# Altium PCB 400926.PcbDoc (part 5 of 7)
Units mm, origin at the board's own origin, x right, y up, seen from the top; angles counter-clockwise.
Board outline 148.5 x 63.5 mm, 4 copper layers (Top Layer, Mid-Layer 1, Mid-Layer 2, Bottom Layer), stack 1.514 mm thick; 311 components, 281 nets, 1495 pads, 2232 vias.
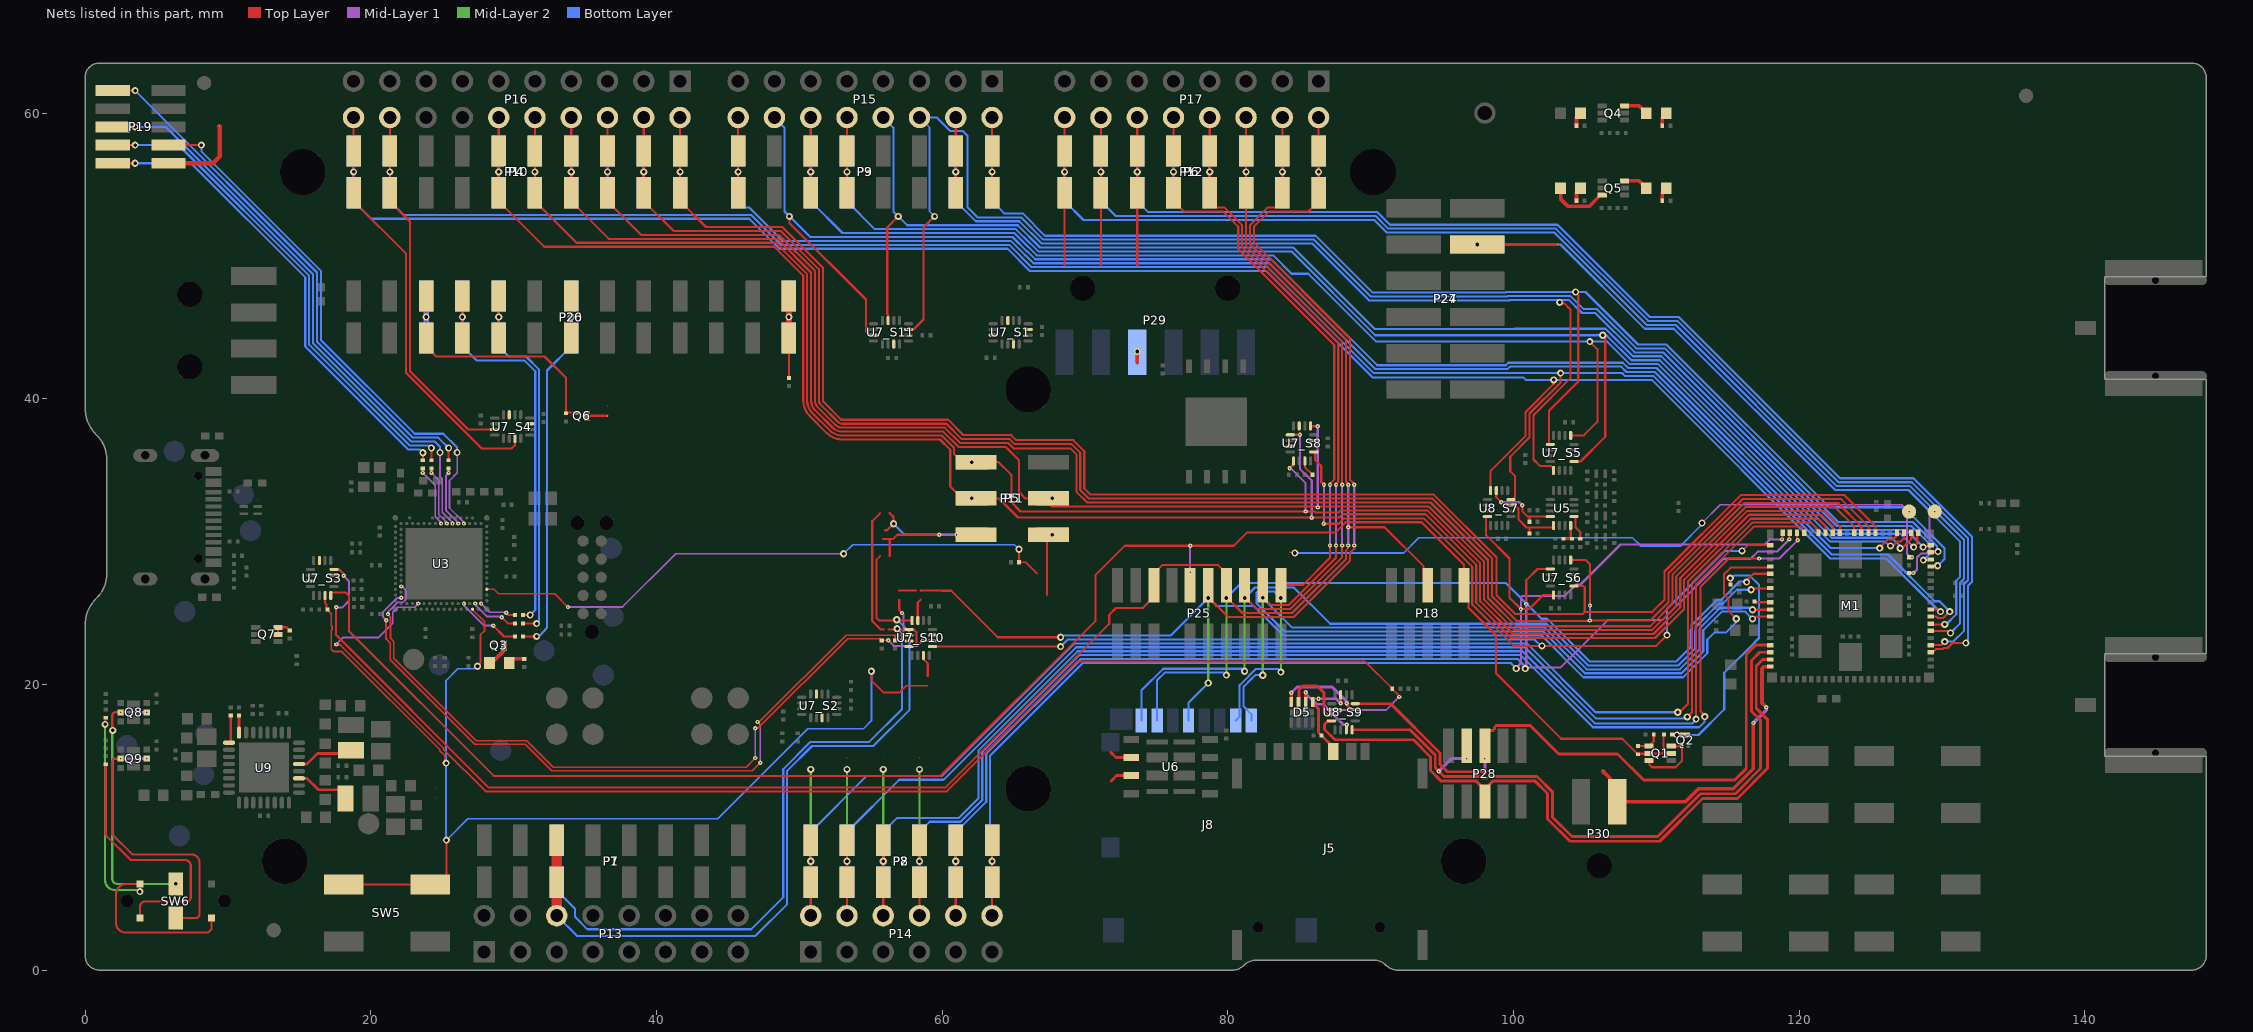
[diagram p6: the nets of this part, all layers, seen from the top]

## Via types
v1: diameter 0.5, hole 0.25, Top Layer to Bottom Layer, tented both sides, 1704 vias
v2: diameter 0.3, hole 0.1, Top Layer to Mid-Layer 1, tented top, 426 vias
v3: diameter 0.3, hole 0.1, Top Layer to Mid-Layer 1, tented both sides, 93 vias
v4: diameter 0.61, hole 0.305, Top Layer to Bottom Layer, tented both sides, 9 vias

## Nets (pads, with @x,y where several pads share a name; then routed paths per layer and width w, separated by ;. In a path a pad name is that pad's centre, name@x,y a point inside that pad or via, vN(x,y) a via of type N, cw(c..) or ccw(c..) an arc to the next point about the centre after c; other vN are vias at no path point) (continued)
NetLED1_2: LED1.2 R39.1 | length 1
  Top Layer w0.254: R39.1@104.413,59.117 104.413,59.689 LED1.2@104.698,59.974
NetLED2_1: LED2.1 Q4.3 | length 1.8
  Top Layer w0.254: Q4.3@107.75,60.499 Q4.3@107.775,60.499 108.801,60.499 109.022,60.278 109.047,60.278 109.301,60.024 LED2.1@109.301,59.999
NetLED2_2: LED2.2 R40.1 | length 1
  Top Layer w0.254: R40.1@110.413,59.117 110.413,59.689 110.698,59.974 LED2.2@110.698,59.999
NetLED3_1: LED3.1 Q5.6 | length 4.1
  Top Layer w0.254: LED3.1@103.301,54.749 103.301,53.99 103.827,53.465 105.304,53.465 Q5.6@106.039,54.201 ; Q5.6@106.202,54.201 Q5.6@106.25,54.249
NetLED3_2: LED3.2 R41.1 | length 1
  Top Layer w0.254: R41.1@104.413,53.867 104.413,54.439 104.698,54.724 LED3.2@104.698,54.749
NetLED4_1: LED4.1 Q5.3 | length 1.4
  Top Layer w0.254: Q5.3@107.75,55.249 Q5.3@107.775,55.249 108.801,55.249 LED4.1@109.022,55.028
NetLED4_2: LED4.2 R42.1 | length 1
  Top Layer w0.254: R42.1@110.413,53.867 110.413,54.439 110.698,54.724 LED4.2@110.698,54.749
NetLED5_1: LED5.1 Q3.3 | length 1.7
  Top Layer w0.25: LED5.1@28.301,21.499 28.45,21.499 29.325,22.374 Q3.3@29.325,22.724
NetLED5_2: LED5.2 R33.1 | length 1.2
  Top Layer w0.25: LED5.2@29.698,21.499 29.983,21.784 R33.1@30.75,21.784
NetM1_10: M1.10 R1.2 | length 1.1
  Top Layer w0.15: R1.2@116.885,25.799 116.935,25.749 M1.10@117.975,25.749
NetM1_99: M1.99 TP1.1 | length 5.4
  Top Layer w0.15: M1.99@127.7,27.799 v3(128,27.799)
  Mid-Layer 1 w0.15: v3(128,27.799) 128.25,28.049 128.25,28.885 128.521,29.157 128.863,29.157 129.135,29.428 129.135,31.734 v3(129.5,32.099)
NetM1_101: M1.101 SB11.2 TP2.1 | length 49.2
  Top Layer w0.125: SB11.2@84.35,29.249 84.539,29.249 84.556,29.232 84.667,29.232 v1(84.7,29.199)
  Top Layer w0.15: M1.101@127.7,28.899 127.703,28.902 127.898,28.902 v3(127.9,28.904)
  Mid-Layer 1 w0.125: v1(113.2,31.299) 114.477,32.576 127.176,32.576 127.653,32.099 v3(127.7,32.099)
  Mid-Layer 1 w0.15: v3(127.7,32.099) 127.7,32.086 127.55,31.936 127.55,29.149 127.785,28.914 127.891,28.914 v3(127.9,28.904)
  Bottom Layer w0.125: v1(84.7,29.199) 92.319,29.199 93.381,30.261 108.337,30.261 108.9,29.699 111.7,29.699 113.2,31.199 v1(113.2,31.299)
NetP5_6: P5.6 P11.6 SB18.1 SB19.2 | length 4
  Top Layer w0.152: 67.338,26.274 P5.6@67.338,30.262
  other v1: 67.722,30.48
NetP19_1: P19.1 SB15.1 SB16.1 | length 5.9
  Top Layer w0.3: P19.1@5.836,56.49 8.95,56.49 9.438,56.977 9.438,57.602 9.438,59.056 SB16.1@9.4,59.094
NetP20_3: P20.3 P26.3 Q6.1 R67.1 | length 20.9
  Top Layer w0.15: P20.3@23.876,47.752 P20.3@23.876,47.185 v1(23.876,45.72) P20.3@23.876,44.255 23.876,43.673 24.589,42.96 32.164,42.96 33.675,41.449 R67.1@33.675,39.024 ; R67.1@33.675,38.984 R67.1@33.675,39.024 ; Q6.1@34.425,39.024 R67.1@33.675,39.024
  Bottom Layer w0.381: P26.3@23.876,44.255 v1(23.876,45.72) P26.3@23.876,47.185
NetP20_13: P20.13 P26.13 R68.2 | length 9.3
  Top Layer w0.152: R68.2@49.276,41.459 P20.13@49.276,44.255 49.276,44.203 P20.13@49.71,43.769
  Top Layer w0.381: P20.13@49.276,44.255 v1(49.276,45.72) P20.13@49.276,47.185
  Bottom Layer w0.381: P26.13@49.276,44.255 v1(49.276,45.72) P26.13@49.276,47.185
NetP29_3: P29.3 SB20.2 | length 0.8
  Top Layer w0.254: 73.66,42.516 SB20.2@73.66,42.554 v1(73.66,43.309)
NetQ1_3: Q1.3 Q1.6 Q2.1 | length 4.7
  Top Layer w0.15: Q1.6@109.49,14.674 109.537,14.627 109.537,14.362 109.7,14.199 111.348,14.199 111.79,14.641 Q2.1@111.79,15.724 ; Q1.3@111.04,15.674 111.74,15.674 Q2.1@111.79,15.724 ; Q2.1@111.79,15.749 Q2.1@111.79,15.724
NetQ1_4: Q1.4 R8.2 R10.2 | length 1.7
  Top Layer w0.15: R10.2@108.715,15.684 109.5,15.684 109.825,16.009 R8.2@109.825,16.499
NetQ6_3: Q6.3 SB17.1 | length 1.5
  Top Layer w0.15: Q6.3@35.125,38.799 35.135,38.809 SB17.1@36.576,38.809
NetQ7_5: Q7.5 Q7.6 R75.2 | length 1.4
  Top Layer w0.15: Q7.5@13.5,23.499 Q7.6@13.5,23.999 14.11,23.999 R75.2@14.325,23.784
NetQ8_2: Q8.2 Q8.5 SW6.5 | length 18.6
  Top Layer w0.15: v1(1.936,16.777) 1.9,16.813 1.9,17.799 cw(c2.15,17.799) 2.15,18.049 v2(2.495,18.049)
  Mid-Layer 1 w0.15: v2(2.495,18.049) v2(4.305,18.049)
  Mid-Layer 2 w0.15: v1(1.936,16.777) 1.9,16.741 1.9,6.388 ccw(c2.254,6.388) 2.254,6.034 v1(6.35,6.034)
NetQ9_2: Q9.2 Q9.5 SW6.2 | length 20.1
  Top Layer w0.15: v2(2.495,14.799) 2.1,14.799 ccw(c2.1,14.599) 1.9,14.599 1.9,9.561 ccw(c2.05,9.561) 1.944,9.455 3.256,8.143 ccw(c3.362,8.249) 3.362,8.099 7.46,8.099 cw(c7.46,7.559) 8,7.559 8,3.899 cw(c7.735,3.899) 7.735,3.634 SW6.2@6.35,3.634
  Mid-Layer 1 w0.15: v2(2.495,14.799) v2(4.305,14.799)
NetR36_1: R36.1 U9.17 | length 2
  Top Layer w0.2: U9.17@10.075,15.924 ccw(c10.075,16.049) 10.2,16.049 R36.1@10.2,17.814
NetR37_1: R37.1 U9.16 | length 1.2
  Top Layer w0.2: R37.1@10.769,17.821 10.769,16.624 U9.16@10.775,16.624
NetR51_1: R51.1 U5.1 | length 1.7
  Top Layer w0.15: U5.1@104.235,31.749 104.34,31.644 104.34,31.013 104.68,30.673 R51.1@104.68,30.196
NetR58_1: R58.1 R59.2 U5.16 | length 1.5
  Top Layer w0.15: R59.2@103.511,30.196 R58.1@104.095,30.196 104.01,30.281 U5.16@104.01,31.124
NetR77_2: R77.2 SW6.3 SW6.4 | length 26.3
  Top Layer w0.15: v1(1.4,17.199) 1.425,17.224 1.425,17.639 R77.2@1.45,17.664 ; SW6.4@3.85,6.034 2.901,6.034 ccw(c2.901,5.308) 2.175,5.308 2.175,3.278 ccw(c2.819,3.278) 2.819,2.634 8.573,2.634 ccw(c8.573,2.784) 8.679,2.678 8.806,2.805 ccw(c8.7,2.911) 8.85,2.911 SW6.3@8.85,3.634
  Mid-Layer 2 w0.15: v1(1.4,17.199) 1.4,6.299 ccw(c2.1,6.299) 2.1,5.599 3.735,5.599 cw(c3.735,5.494) v1(3.84,5.494)
NetR79_1: R79.1 SW6.1 | length 18.8
  Top Layer w0.15: R79.1@1.45,14.414 1.45,9.511 ccw(c1.6,9.511) 1.494,9.405 3.156,7.743 ccw(c3.262,7.849) 3.262,7.699 7.011,7.699 cw(c7.011,7.31) 7.4,7.31 7.4,5.099 cw(c7.1,5.099) 7.1,4.799 4.2,4.799 ccw(c4.2,4.449) 3.85,4.449 SW6.1@3.85,3.634
NetSB13_1: SB13.1 U6.2 | length 1.6
  Top Layer w0.2: 71.812,15.249 72.177,14.884 U6.2@73.25,14.884
NetSB14_1: SB14.1 U6.3 | length 1.6
  Top Layer w0.2: SB14.1@71.838,13.249 72.203,13.614 U6.3@73.25,13.614
NO.CH1_S1: U7_S1.15
NO.CH1_S8: R35.1 U7_S8.15 | length 1.2
  Top Layer w0.125: U7_S8.15@85.4,35.649 85.4,35.208 R35.1@85.938,34.67
NO.CH1_S9: C48.1 D5.5 J5.C1 U8_S9.15 | length 6.8
  Top Layer w0.2: D5.5@85.95,18.774 85.95,18.699 86.35,18.299 86.35,16.634 C48.1@86.56,16.424 87.38,15.604 J5.C1@87.38,15.299 ; D5.5@85.95,18.999 v2(86.35,18.999) ; v2(87.9,18.674) U8_S9.15@87.9,19.274
  Mid-Layer 1 w0.2: v2(86.35,18.999) 87.575,18.999 v2(87.9,18.674)
NO.CH1_S10: SB22.2 U7_S10.15 | length 1.5
  Top Layer w0.15: U7_S10.15@58.3,24.474 58.3,25.737 58.5,25.937
NO.CH2_S1: U7_S1.3
NO.CH2_S2: U7_S2.3
NO.CH2_S3: U7_S3.3
NO.CH2_S8: U7_S8.3
NO.CH2_S9: D5.7 U8_S9.3 | length 4.9
  Top Layer w0.2: D5.7@84.95,18.774 84.975,18.799 84.975,19.624 85.25,19.899 86.255,19.899 86.725,19.429 86.725,18.11 86.986,17.849 U8_S9.3@87.275,17.849
NO.CH2_S10: SB23.2 U7_S10.3 | length 3.6
  Top Layer w0.15: SB23.2@57,25.911 SB23.2@57,25.899 57,25.199 v2(57.2,24.999) ; v2(57.15,23.049) U7_S10.3@57.675,23.049
  Mid-Layer 1 w0.15: v2(57.15,23.049) 57.3,23.199 57.3,24.899 v2(57.2,24.999)
NO.CH3_S1: U7_S1.7
NO.CH3_S3: U7_S3.7
NO.CH3_S4: U7_S4.7
NO.CH3_S8: U7_S8.7
NO.CH3_S9: D5.6 U8_S9.7 | length 4.9
  Top Layer w0.2: D5.6@85.45,18.774 v2(85.45,19.449) ; U8_S9.7@88.3,16.824 88.3,17.149 v2(88.325,17.174)
  Mid-Layer 1 w0.2: v2(85.45,19.449) 85.45,19.369 86.204,18.615 86.659,18.615 88.1,17.174 v2(88.325,17.174)
NO.CH3_S10: SB24.1 U7_S10.7 | length 1.6
  Top Layer w0.15: U7_S10.7@58.7,22.024 58.7,21.771 59,21.471 SB24.1@59,20.599 SB24.1@59,20.587
NO.CH4_S1: U7_S1.11
NO.CH4_S2: U7_S2.11
NO.CH4_S3: U7_S3.11
NO.CH4_S4: U7_S4.11
NO.CH4_S8: U7_S8.11
NO.CH4_S9: D5.8 U8_S9.11 | length 6.1
  Top Layer w0.2: D5.8@84.45,18.774 v2(84.45,19.424) ; v2(88.325,18.674) 88.325,18.549 88.625,18.249 U8_S9.11@88.925,18.249
  Mid-Layer 1 w0.2: v2(84.45,19.424) 84.85,19.824 87.315,19.824 88.325,18.814 v2(88.325,18.674)
NO.CH4_S10: U7_S10.11
NO.CH4_S11: U7_S11.11
nRESET: Q2.3 R2.1 R9.2 | length 17.6
  Top Layer w0.15: R9.2@111.1,16.499 v1@111.398,16.499 ; v1(111.44,16.458) v1@111.398,16.499 ; Q2.3@112.015,16.449 111.965,16.499 v1@111.398,16.499 ; v1(115.181,27.437) 115.191,27.428 115.191,26.993 R2.1@115.2,26.984
  Bottom Layer w0.15: v1(111.44,16.458) 112.959,16.458 114.762,18.261 114.762,20.811 116.837,22.886 116.837,22.904 117.187,23.254 117.187,26.972 116.548,27.612 115.444,27.612 115.269,27.437 v1(115.181,27.437)
P0.00: M1.56 P3.1 P9.1 P15.2 U7_S5.1 | length 99.1
  Top Layer w0.15: P3.1@63.5,54.415 v1(63.5,55.88) P3.1@63.5,57.345 P15.2@63.5,59.69 ; U7_S5.1@102.585,36.808 102.5,36.893 102.5,39.171 104.535,41.206 104.535,47.289 v1(104.35,47.474) ; M1.56@129.225,28.249 129.375,28.274 129.604,28.274 ccw(c129.603,28.424) v1(129.694,28.305)
  Bottom Layer w0.15: P9.1@63.5,57.345 v1(63.5,55.88) P9.1@63.5,54.415 63.5,53.83 64.356,52.974 65.639,52.974 67.198,51.415 86.148,51.415 90.138,47.425 99.46,47.425 99.509,47.474 v1(104.35,47.474) 105.041,47.474 108.715,43.799 110.7,43.799 122.1,32.399 127.314,32.399 130.175,29.538 130.175,28.774 130.089,28.688 129.734,28.333 cw(c129.628,28.439) v1(129.694,28.305)
P0.01: M1.57 P3.2 P9.2 P15.4 U7_S5.5 | length 103.3
  Top Layer w0.15: P3.2@60.96,54.415 v1(60.96,55.88) P3.2@60.96,57.345 P15.4@60.96,59.69 ; U7_S5.5@102.81,34.983 102.81,35.098 102.61,35.298 101.851,35.298 101.4,35.749 101.4,38.849 103.985,41.434 103.985,46.248 103.545,46.688 103.296,46.688 v1(103.235,46.749) ; v1(128.7,28.699) 128.725,28.724 129.2,28.724 M1.57@129.225,28.749
  Bottom Layer w0.15: P9.2@60.96,57.345 v1(60.96,55.88) P9.2@60.96,54.415 60.96,53.83 62.366,52.424 65.411,52.424 66.97,50.865 85.92,50.865 89.91,46.875 99.688,46.875 99.737,46.924 v1@103.235,46.924 ; v1(103.235,46.749) v1@103.235,46.924 ; v1(128.7,28.699) 129.135,29.134 129.135,29.801 127.842,31.093 122.628,31.093 110.472,43.249 108.488,43.249 105.738,45.999 104.799,45.999 103.874,46.924 v1@103.235,46.924
P0.02: M1.58 P15.6 U7_S11.15 | length 103.8
  Top Layer w0.15: U7_S11.15@57.643,44.849 58,44.849 58.695,45.544 58.695,51.991 v1(59.473,52.769) ; M1.58@129.225,29.249 129.25,29.274 129.7,29.274 v1(129.725,29.299)
  Bottom Layer w0.125: P15.6@58.42,59.69 58.518,59.592 59.117,58.992 59.117,53.125 v1(59.473,52.769)
  Bottom Layer w0.15: P15.6@58.518,59.592 58.616,59.69 59.616,59.69 60.566,58.74 61.453,58.74 61.78,58.413 61.78,53.399 62.48,52.699 65.525,52.699 67.084,51.14 86.034,51.14 90.024,47.15 99.574,47.15 99.623,47.199 103.988,47.199 104.913,46.274 105.852,46.274 108.602,43.524 110.586,43.524 122.742,31.368 127.956,31.368 129.658,29.666 129.658,29.366 v1(129.725,29.299)
P0.03: M1.59 P15.8 U7_S11.3 | length 97
  Top Layer w0.15: U7_S11.3@56.218,45.474 56.218,45.874 56.155,45.936 56.155,46.05 56.155,51.991 v1(56.933,52.769) ; v1(128.685,29.614) 128.752,29.681 129.157,29.681 M1.59@129.225,29.749
  Bottom Layer w0.15: P15.8@55.88,59.69 56.59,58.98 56.59,53.113 v1(56.933,52.769) 57.554,52.149 65.297,52.149 66.856,50.59 84.573,50.59 90.278,44.885 100.072,44.885 100.086,44.899 106.449,44.899 108.374,42.974 110.358,42.974 122.514,30.818 127.481,30.818 v1(128.685,29.614)
P0.04: M1.61 P3.5 P9.5 P15.10 U7_S5.9 | length 104.7
  Top Layer w0.15: P3.5@53.34,54.415 P3.5@53.34,57.345 P15.10@53.34,59.69 ; U7_S5.9@104.235,35.608 104.693,35.608 106.429,37.343 106.429,44.273 v1(106.252,44.449) ; v1(128.015,29.614) 128.015,29.617 128.275,29.877 128.275,30.549 M1.61@128.35,30.624
  Bottom Layer w0.15: P9.5@53.34,57.345 v1(53.34,55.88) P9.5@53.34,54.415 53.34,53.83 55.296,51.874 65.158,51.874 66.158,50.874 66.183,50.874 66.742,50.315 84.459,50.315 90.325,44.449 v1(106.252,44.449) 106.319,44.382 106.577,44.382 108.26,42.699 110.245,42.699 122.4,30.543 127.086,30.543 v1(128.015,29.614)
P0.05: M1.62 P3.6 P9.6 P15.12 U7_S5.13 | length 104.8
  Top Layer w0.15: P3.6@50.8,54.415 P3.6@50.8,57.345 P15.12@50.8,59.69 ; U7_S5.13@104.01,37.433 104.92,37.433 105.879,38.391 105.879,43.47 v1(105.35,43.999) ; v1(127.071,29.535) 127.138,29.602 127.278,29.602 127.85,30.174 M1.62@127.85,30.624
  Bottom Layer w0.15: P9.6@50.8,57.345 v1(50.8,55.88) P9.6@50.8,54.415 50.8,53.83 53.031,51.599 65.044,51.599 66.044,50.599 66.069,50.599 66.628,50.04 83.173,50.04 84.464,48.749 85.636,48.749 90.37,44.015 105.334,44.015 v1(105.35,43.999) 106.571,43.999 108.146,42.424 110.131,42.424 122.286,30.268 126.467,30.268 127.004,29.731 127.004,29.602 v1(127.071,29.535)
P0.06: M1.63 P15.14 U7_S11.7 | length 106.6
  Top Layer w0.15: v1(49.313,52.769) 49.313,52.297 54.668,46.942 54.668,44.721 54.94,44.449 U7_S11.7@55.193,44.449 ; v1(126.4,29.699) 126.519,29.699 126.572,29.752 126.606,29.752 126.862,30.007 127.108,30.007 127.35,30.249 M1.63@127.35,30.624
  Bottom Layer w0.15: P15.14@48.26,59.69 48.97,58.98 48.97,53.113 v1(49.313,52.769) 50.759,51.324 64.93,51.324 65.93,50.324 65.955,50.324 66.514,49.765 83.034,49.765 90.454,42.345 99.46,42.345 99.639,42.524 107.657,42.524 108.032,42.149 110.017,42.149 122.172,29.993 126.023,29.993 126.317,29.699 v1(126.4,29.699)
P0.07: M1.64 P3.8 P9.8 P15.16 | length 100.7
  Top Layer w0.15: P3.8@45.72,54.415 P3.8@45.72,57.345 P15.16@45.72,59.69 ; v1(125.648,29.543) 125.648,29.583 126.214,30.149 126.573,30.149 126.85,30.426 M1.64@126.85,30.624
  Bottom Layer w0.15: P9.8@45.72,57.345 v1(45.72,55.88) P9.8@45.72,54.415 45.72,53.83 46.155,53.395 46.486,53.395 48.832,51.049 64.817,51.049 65.817,50.049 65.841,50.049 66.4,49.49 82.92,49.49 90.34,42.07 99.574,42.07 99.753,42.249 107.543,42.249 107.918,41.874 109.903,41.874 122.233,29.543 v1(125.648,29.543)
P0.08: M1.67 P4.1 P10.1 P16.2 U7_S6.1 | length 121.5
  Top Layer w0.15: P16.2@41.656,59.69 P4.1@41.656,57.345 v1(41.656,55.88) P4.1@41.656,54.415 41.656,53.83 43.468,52.018 48.814,52.018 51.65,49.182 51.65,39.886 ccw(c51.8,39.886) 51.694,39.78 52.906,38.568 ccw(c53.012,38.674) 53.012,38.524 60.425,38.524 61.5,37.449 64.85,37.449 65.2,37.099 69.181,37.099 69.95,36.33 69.95,33.724 70.389,33.285 94.423,33.285 98.825,28.883 98.825,26.224 100.125,24.924 104.851,24.924 105.005,25.078 ; U7_S6.1@104.235,26.883 104.909,26.883 104.997,26.795 104.997,25.087 105.005,25.078 ; M1.67@125.35,30.624 125.35,31.074 123.175,33.249 115.92,33.249 110.575,27.904 110.575,25.929 109.724,25.078 105.005,25.078
  Bottom Layer w0.15: P10.1@41.656,54.415 v1(41.656,55.88) P10.1@41.656,57.345
P0.09: M1.68 P4.2 P10.2 P16.4 U7_S6.5 | length 126.6
  Top Layer w0.15: P16.4@39.116,59.69 P4.2@39.116,57.345 v1(39.116,55.88) P4.2@39.116,54.415 39.116,53.83 41.203,51.743 48.7,51.743 51.375,49.069 51.375,39.886 ccw(c51.8,39.886) 51.498,39.587 52.713,38.372 ccw(c53.012,38.674) 53.012,38.249 60.311,38.249 61.386,37.174 64.736,37.174 65.086,36.824 69.067,36.824 69.675,36.216 69.675,33.61 70.275,33.01 94.309,33.01 98.495,28.824 98.495,26.165 100.211,24.449 105.287,24.449 105.312,24.474 v2(105.35,24.474) 109.584,24.474 110.85,25.74 110.85,27.79 116.034,32.974 122.95,32.974 124.85,31.074 M1.68@124.85,30.624 ; U7_S6.5@104.01,28.708 105.066,28.708 105.354,28.42 v2(105.354,25.52)
  Mid-Layer 1 w0.15: v2(105.35,24.474) 105.352,24.476 105.352,25.517 v2(105.354,25.52)
  Bottom Layer w0.15: P10.2@39.116,54.415 v1(39.116,55.88) P10.2@39.116,57.345
P0.10: M1.69 P4.3 P10.3 P16.6 | length 123.3
  Top Layer w0.15: P16.6@36.576,59.69 P4.3@36.576,57.345 v1(36.576,55.88) P4.3@36.576,54.415 36.576,53.83 38.938,51.468 48.586,51.468 51.1,48.955 51.1,39.886 ccw(c51.8,39.886) 51.302,39.394 52.52,38.177 ccw(c53.012,38.674) 53.012,37.974 60.197,37.974 61.272,36.899 64.622,36.899 64.997,36.524 68.978,36.524 69.4,36.102 69.4,33.496 70.161,32.735 94.196,32.735 98.22,28.711 98.22,26.051 100.197,24.074 109.573,24.074 111.125,25.626 111.125,27.676 116.148,32.699 122.725,32.699 124.35,31.074 M1.69@124.35,30.624
  Bottom Layer w0.15: P10.3@36.576,54.415 v1(36.576,55.88) P10.3@36.576,57.345
P0.11: M1.70 P4.4 P5.4 P10.4 P11.4 P16.8 U7_S8.5 | length 131.5
  Top Layer w0.15: P16.8@34.036,59.69 P4.4@34.036,57.345 v1(34.036,55.88) P4.4@34.036,54.415 34.036,53.823 36.665,51.193 39.881,51.193 39.882,51.192 40.483,51.192 40.485,51.193 48.473,51.193 50.825,48.841 50.825,39.886 ccw(c51.8,39.886) 51.108,39.199 52.325,37.982 ccw(c53.012,38.674) 53.012,37.699 60.083,37.699 61.158,36.624 64.45,36.624 65.331,35.743 cw(c65.225,35.637) 65.375,35.637 65.375,33.536 ccw(c65.525,33.536) 65.418,33.431 ; 65.419,33.43 65.829,33.02 P5.4@67.119,33.02 ; P5.4@67.437,33.02 P5.4@67.119,33.02 ; U7_S8.5@85.8,38.099 85.825,38.074 v2(86.3,38.074) ; v2(86.3,32.385) 86.269,32.416 ccw(c86.163,32.31) 86.163,32.46 67.679,32.46 P5.4@67.119,33.02 ; v2@86.416,32.46 94.082,32.46 97.945,28.597 97.945,25.937 100.083,23.799 109.687,23.799 111.4,25.512 111.4,27.562 116.262,32.424 122.5,32.424 123.85,31.074 M1.70@123.85,30.624
  Mid-Layer 1 w0.15: v2(86.3,32.385) v2(86.3,38.074)
  Bottom Layer w0.15: P10.4@34.036,54.415 v1(34.036,55.88) P10.4@34.036,57.345
  other v1: 67.722,33.02
P0.12: M1.72 P4.5 P5.1 P10.5 P11.1 P16.10 U7_S8.13 | length 130.9
  Top Layer w0.15: P16.10@31.496,59.69 P4.5@31.496,57.345 v1(31.496,55.88) P4.5@31.496,54.415 31.496,53.83 34.408,50.918 39.767,50.918 39.769,50.917 40.597,50.917 40.599,50.918 48.359,50.918 50.55,48.727 50.55,39.886 ccw(c51.8,39.886) 50.914,39.005 52.13,37.788 ccw(c53.012,38.674) 53.012,37.424 59.969,37.424 60.844,36.549 60.844,36.12 61.404,35.56 v1(62.072,35.56) P5.1@62.357,35.56 63.944,35.56 64.803,34.702 cw(c64.697,34.596) 64.847,34.596 64.847,33.671 64.847,32.814 ccw(c64.997,32.814) 64.89,32.709 65.456,32.143 ccw(c65.562,32.249) 65.562,32.099 v2(85.45,32.099) ; v2(84.325,35.124) 84.6,35.399 U7_S8.13@84.6,35.649 ; v2@85.47,32.079 85.491,32.099 86.091,32.099 86.155,32.035 87.761,32.035 87.911,32.185 93.968,32.185 97.67,28.483 97.67,25.823 99.969,23.524 109.801,23.524 111.675,25.398 111.675,27.448 116.376,32.149 119.538,32.149 120.538,32.149 120.541,32.147 121.777,32.147 122.85,31.074 M1.72@122.85,30.624
  Mid-Layer 1 w0.15: v2(84.325,35.124) 84.411,35.124 85.45,34.085 v2(85.45,32.099)
  Bottom Layer w0.15: P10.5@31.496,54.415 v1(31.496,55.88) P10.5@31.496,57.345
P0.13/AIN0: M1.73 P4.6 P5.3 P10.6 P11.3 P16.12 U7_S8.9 | length 135.8
  Top Layer w0.15: P16.12@28.956,59.69 P4.6@28.956,57.345 v1(28.956,55.88) P4.6@28.956,54.415 28.956,53.83 32.143,50.643 39.653,50.643 39.655,50.642 40.711,50.642 40.713,50.643 48.245,50.643 50.275,48.613 50.275,39.886 ccw(c51.8,39.886) 50.72,38.81 51.936,37.594 ccw(c53.012,38.674) 53.012,37.149 59.855,37.149 60.569,36.435 60.569,33.855 61.404,33.02 P5.3@62.357,33.02 63.917,33.02 cw(c63.917,32.87) 64.023,32.976 65.281,31.718 ccw(c65.387,31.824) 65.387,31.674 v2(85.875,31.674) ; U7_S8.9@84.375,37.474 v2(85.05,37.474) ; v2@85.944,31.674 87.789,31.674 88.025,31.91 93.854,31.91 97.395,28.369 97.395,25.709 99.855,23.249 109.915,23.249 111.95,25.284 111.95,27.334 116.49,31.874 119.425,31.874 120.425,31.874 120.427,31.872 121.552,31.872 122.35,31.074 M1.73@122.35,30.624
  Mid-Layer 1 w0.15: v2(85.05,37.474) 85.05,35.099 85.875,34.274 v2(85.875,31.674)
  Bottom Layer w0.15: P10.6@28.956,54.415 v1(28.956,55.88) P10.6@28.956,57.345
  other v1: 62.072,33.02
P0.14/AIN1: M1.74 P2.1 P8.1 P14.2 SB5.1 | length 105
  Top Layer w0.15: P14.2@50.8,3.81 P2.1@50.8,6.155 v1(50.8,7.62) P2.1@50.8,9.085 ; v1(111.5,18.054) 111.567,18.121 111.692,18.121 112.225,18.654 112.225,27.22 116.604,31.599 119.311,31.599 120.311,31.599 120.313,31.597 121.327,31.597 121.85,31.074 M1.74@121.85,30.624
  Mid-Layer 2 w0.15: v1(50.8,7.62) v1(50.8,14.049)
  Bottom Layer w0.15: P8.1@50.8,6.155 v1(50.8,7.62) P8.1@50.8,9.085 50.8,9.67 54.729,13.599 59.994,13.599 69.269,22.874 100.925,22.874 105.745,18.054 v1(111.5,18.054)
P0.15/AIN2: M1.75 P2.2 P8.2 P14.4 SB6.1 | length 102
  Top Layer w0.15: P14.4@53.34,3.81 P2.2@53.34,9.085 ; v1@112.165,17.725 112.5,18.06 112.5,27.106 116.718,31.324 119.197,31.324 120.197,31.324 120.199,31.322 120.81,31.322 121.2,30.932 121.2,30.849 121.35,30.699 M1.75@121.35,30.624
  Mid-Layer 2 w0.15: v1(53.34,7.62) v1(53.34,14.049)
  Bottom Layer w0.15: P8.2@53.34,6.155 v1(53.34,7.62) P8.2@53.34,9.085 53.34,9.67 56.994,13.324 60.108,13.324 69.383,22.599 100.811,22.599 105.806,17.604 111.95,17.604 112.07,17.724 v1(112.165,17.724)
P0.16/AIN3: M1.77 P2.3 P8.3 P14.6 SB9.1 | length 100.5
  Top Layer w0.15: P14.6@55.88,3.81 P2.3@55.88,6.155 v1(55.88,7.62) P2.3@55.88,9.085 ; v1(112.792,17.568) 112.792,27.009 116.832,31.049 119.083,31.049 120.083,31.049 120.2,30.932 120.2,30.849 120.35,30.699 M1.77@120.35,30.624
  Mid-Layer 2 w0.15: v1(55.88,7.62) v1(55.88,14.049)
  Bottom Layer w0.15: P8.3@55.88,6.155 v1(55.88,7.62) P8.3@55.88,9.085 55.88,9.67 56.865,10.655 61.178,10.655 62.539,12.016 62.539,15.366 69.497,22.324 100.632,22.324 105.682,17.274 112.538,17.274 112.792,17.528 v1(112.792,17.568)
P0.17/AIN4: M1.78 P2.4 P8.4 P14.8 SB10.1 | length 97.8
  Top Layer w0.15: P14.8@58.42,3.81 P2.4@58.42,6.155 v1(58.42,7.62) P2.4@58.42,9.085 ; v1(113.39,17.747) 113.39,17.838 113.1,18.128 113.1,26.839 115.072,28.812 v3(117.2,28.812) ; M1.78@119.85,30.624 119.85,30.19 119.9,30.14 v3(119.9,30.099)
  Mid-Layer 1 w0.15: v3(117.2,28.812) 118.613,28.812 v3(119.9,30.099)
  Mid-Layer 2 w0.15: v1(58.42,7.62) v1(58.42,14.049)
  Bottom Layer w0.15: P8.4@58.42,6.155 v1(58.42,7.62) P8.4@58.42,9.085 58.42,9.67 59.13,10.38 61.292,10.38 62.814,11.902 62.814,15.252 69.611,22.049 100.518,22.049 105.568,16.999 113,16.999 113.383,17.382 113.383,17.74 v1(113.39,17.747)
P0.18/AIN5: M1.79 P2.5 P8.5 P14.10 U7_S6.9 | length 86.8
  Top Layer w0.15: P14.10@60.96,3.81 P2.5@60.96,6.155 v1(60.96,7.62) P2.5@60.96,9.085 ; v2(100.9,25.624) 100.9,27.299 101.684,28.083 U7_S6.9@102.585,28.083 ; v3(119.3,30.149) 119.325,30.174 119.325,30.599 M1.79@119.35,30.624
  Mid-Layer 1 w0.15: v1(100.828,21.102) v1@100.9,21.174 ; v2(100.9,25.624) v1@100.9,21.174 ; v3(119.3,30.149) 118.45,29.299 117.1,29.299 116.6,28.799 114.711,28.799 110.411,24.499 106.6,24.499 103.275,21.174 v1@100.9,21.174
  Bottom Layer w0.15: P8.5@60.96,6.155 v1(60.96,7.62) P8.5@60.96,9.085 60.96,9.67 61.395,10.105 61.406,10.105 63.089,11.788 63.089,15.138 69.725,21.774 100.3,21.774 100.714,21.36 100.714,21.311 100.828,21.197 v1(100.828,21.102)
P0.19/AIN6: M1.80 P2.6 P8.6 P14.12 U7_S6.13 U8_S7.12 | length 89.7
  Top Layer w0.15: P14.12@63.5,3.81 P2.6@63.5,6.155 v1(63.5,7.62) P2.6@63.5,9.085 ; U8_S7.12@98.175,31.749 98.122,31.749 98.09,31.717 98.09,30.445 99.725,28.81 99.725,26.074 v2(100.525,25.274) 101.114,25.274 102.098,26.258 U7_S6.13@102.81,26.258 ; v3(118.8,30.149) 118.825,30.174 118.825,30.599 M1.80@118.85,30.624
  Mid-Layer 1 w0.15: v1(100.2,21.111) 100.2,21.174 100.525,21.499 v2(100.525,25.274) 100.525,26.111 100.613,26.199 103.6,26.199 104.4,26.999 104.7,26.999 107.5,29.799 117.6,29.799 117.95,30.149 v3(118.8,30.149)
  Bottom Layer w0.15: P8.6@63.5,6.155 v1(63.5,7.62) P8.6@63.5,9.085 63.364,9.221 63.364,15.024 69.839,21.499 99.812,21.499 v1(100.2,21.111)
P0.20/AIN7: M1.2 U7_S8.1 U7_S10.9 | length 89
  Top Layer w0.15: U7_S10.9@59.325,22.649 v1(68.3,22.649) ; U7_S8.1@86.025,36.274 86.11,36.189 86.11,35.728 86.548,35.29 86.548,34.154 v2(86.734,33.968) ; v2(86.725,31.249) 87.761,31.249 88.136,31.624 93.728,31.624 97.12,28.232 97.12,25.596 100.017,22.699 v1(102,22.699) 110.003,22.699 v1(110.751,23.448) ; v1(116,29.349) 116.4,29.749 M1.2@117.975,29.749
  Mid-Layer 1 w0.15: v2(86.725,31.249) 86.729,31.253 86.729,33.964 v2@86.725,33.968
  Bottom Layer w0.15: v1(68.3,22.649) 68.8,23.149 101.455,23.149 101.905,22.699 v1(102,22.699) ; v1(110.751,23.448) 110.751,25.293 114.808,29.349 v1(116,29.349)
P0.21: J8.5 M1.5 P6.1 P12.1 P17.2 P25.12 SB22.1 SB23.1 | length 134.2
  Top Layer w0.15: SB23.1@57,26.587 58.168,26.587 ; 58.5,26.561 58.5,26.574 60.018,26.574 60.031,26.561 60.638,26.561 63.9,23.299 v1(68.292,23.299) ; P25.12@78.667,26.081 80.025,24.724 84.625,24.724 88.559,28.658 88.559,29.208 88.853,29.502 88.853,29.721 v2(88.859,29.727) ; P17.2@86.36,59.69 P6.1@86.36,57.345 P6.1@86.36,54.415 86.36,53.83 85.65,53.12 82.914,53.12 81.83,52.036 81.83,50.944 88.559,44.215 88.559,34.338 88.859,34.038 v2(88.859,33.968) ; v1@115.505,24.599 v1(115.6,24.599) 115.05,25.149 115.05,25.996 114.731,26.315 114.731,27.693 115.213,28.174 117.9,28.174 M1.5@117.975,28.249
  Mid-Layer 1 w0.15: v2(88.859,29.727) v2(88.859,33.968)
  Mid-Layer 2 w0.15: v1(78.635,20.099) v1(78.635,26.049)
  Bottom Layer w0.15: v1(68.292,23.299) 68.387,23.299 68.512,23.424 76.01,23.424 v1(78.635,26.049) 79.185,25.499 81.8,25.499 83.875,23.424 101.975,23.424 104.897,20.502 111.881,20.502 113.566,22.187 113.566,23.126 114.082,23.642 114.893,23.642 115.539,24.288 115.539,24.538 v1(115.6,24.599) ; J8.5@77.25,17.469 77.25,18.714 v1(78.635,20.099) ; P12.1@86.36,54.415 P12.1@86.36,57.345
  other v1: 86.36,55.88
P0.22: J8.7 M1.6 P6.2 P12.2 P17.4 P18.6 P25.6 P25.14 U7_S3.4 | length 195.1
  Top Layer w0.15: U7_S3.4@17.425,28.049 17.8,28.049 18.1,27.749 v2(18.1,27.599) ; v2(17.575,25.399) 17.575,23.462 28.263,12.774 60.228,12.774 71.7,24.246 71.7,24.869 72.178,25.346 74.042,25.346 74.825,26.129 P25.6@74.825,26.949 74.825,27.769 75.405,28.349 79.325,28.349 79.905,27.769 P25.14@79.905,26.949 79.905,26.129 81.035,24.999 84.5,24.999 88.284,28.783 88.284,29.383 88.405,29.504 88.405,29.698 v2(88.434,29.727) ; P6.2@83.675,53.395 82.8,53.395 81.555,52.15 81.555,50.83 88.284,44.102 88.284,34.188 88.434,34.038 v2(88.434,33.968) ; P6.2@83.82,54.661 v1(83.82,55.88) P6.2@83.82,57.345 P17.4@83.82,59.69 ; v2(88.425,30.999) 90.975,30.999 93.713,28.261 93.713,27.236 P18.6@94,26.949 ; v1(116.322,27.162) 116.322,27.257 116.455,27.39 116.455,27.402 116.803,27.749 M1.6@117.975,27.749
  Mid-Layer 1 w0.15: v2(17.575,25.399) 17.6,25.374 17.995,25.374 18.475,25.854 18.475,27.224 v2(18.1,27.599) ; v2(88.434,29.727) v2(88.434,33.968)
  Mid-Layer 2 w0.15: v1(79.905,20.649) v1(79.905,26.049)
  Bottom Layer w0.15: J8.7@75.05,17.469 75.05,20.288 75.586,20.824 79.73,20.824 v1(79.905,20.649) ; v1(79.905,26.049) 80.955,27.099 99.463,27.099 101.963,24.599 102.356,24.599 105.353,21.602 111.403,21.602 112.4,22.599 112.4,23.773 112.466,23.839 112.466,24.131 114.252,25.918 114.545,25.918 115.827,27.2 116.285,27.2 v1(116.322,27.162) ; P12.2@83.82,54.415 P12.2@83.82,57.345
P0.23: J8.8 M1.8 P6.3 P12.3 P17.6 P25.16 | length 103.7
  Top Layer w0.15: P25.16@81.175,26.949 81.175,26.124 81.18,26.124 82.03,25.274 84.375,25.274 88.009,28.908 v2(88.009,29.727) ; P17.6@81.28,59.69 P6.3@81.28,57.345 v1(81.28,55.88) P6.3@81.28,54.415 81.28,50.716 88.009,43.988 v2(88.009,33.968) ; v1(116.643,26.626) 116.71,26.693 116.875,26.693 116.906,26.724 117.95,26.724 M1.8@117.975,26.749
  Mid-Layer 1 w0.15: v2(88.009,29.727) v2(88.009,33.968)
  Mid-Layer 2 w0.15: v1(81.175,20.922) ccw(c81.025,20.93) 81.175,20.93 v1(81.175,26.049)
  Bottom Layer w0.15: J8.8@73.95,17.469 73.95,19.577 75.472,21.099 81,21.099 81.161,20.938 cw(c81.054,20.832) v1(81.175,20.922) ; v1(81.175,26.049) 81.909,26.783 84.63,26.783 87.164,24.249 102.317,24.249 105.239,21.327 111.528,21.327 112.7,22.499 112.7,23.684 112.741,23.725 112.741,24.017 114.366,25.643 114.659,25.643 115.642,26.626 v1(116.643,26.626) ; P12.3@81.28,54.415 P12.3@81.28,57.345
P0.24: J8.1 M1.11 P6.4 P12.4 P17.8 P25.18 | length 94.9
  Top Layer w0.15: P6.4@78.6,53.395 79.76,53.395 81.005,52.15 81.005,50.602 87.734,43.874 87.734,34.188 87.584,34.038 v2(87.584,33.968) ; P6.4@78.74,54.415 P17.8@78.74,59.69 ; P25.18@82.445,26.949 82.445,26.129 P25.18@82.485,26.089 ; v1(82.454,26.058) P25.18@82.485,26.089 ; v2(87.584,29.727) 87.584,28.883 84.25,25.549 83.025,25.549 P25.18@82.485,26.089 ; v1(116.737,25.225) 116.741,25.228 117.954,25.228 M1.11@117.975,25.249
  Mid-Layer 1 w0.15: v2(87.584,29.727) v2(87.584,33.968)
  Mid-Layer 2 w0.15: v1(82.445,20.636) 82.445,26.049 v1(82.454,26.058)
  Bottom Layer w0.15: P12.4@78.74,54.415 P12.4@78.74,57.345 ; J8.1@81.65,17.469 81.65,17.909 81.1,18.459 81.1,19.762 cw(c81.25,19.762) 81.143,19.867 81.653,20.377 cw(c81.759,20.27) 81.658,20.382 ccw(c81.175,20.922) 81.715,20.438 cw(c81.826,20.338) 81.72,20.443 81.882,20.605 cw(c81.987,20.499) 81.987,20.649 82.386,20.649 cw(c82.385,20.499) v1(82.445,20.636) ; v1(82.454,26.058) 82.454,26.04 84.52,23.974 102.203,23.974 105.125,21.052 111.653,21.052 113.016,22.415 113.016,23.904 114.48,25.368 116.5,25.368 116.643,25.225 v1(116.737,25.225)
  other v1: 78.74,55.88
P0.25: J8.2 M1.12 P6.5 P12.5 P17.10 P25.20 | length 99.9
  Top Layer w0.15: P6.5@76.2,54.415 76.2,53.83 76.91,53.12 79.646,53.12 80.73,52.036 80.73,50.488 87.459,43.76 87.459,34.338 87.159,34.038 v2(87.159,33.968) ; P6.5@76.2,54.712 v1(76.2,55.88) P6.5@76.2,57.345 P17.10@76.2,59.69 ; v1(83.715,26.049) P25.20@83.715,26.949 85.25,26.949 87.159,28.858 v2(87.159,29.727) ; v1(116.737,24.583) 116.83,24.583 116.996,24.749 M1.12@117.975,24.749
  Mid-Layer 1 w0.15: v2(87.159,29.727) v2(87.159,33.968)
  Mid-Layer 2 w0.15: v1(83.715,20.861) v1(83.715,26.049)
  Bottom Layer w0.15: P12.5@76.2,54.415 P12.5@76.2,57.345 ; J8.2@80.55,17.469 80.825,17.744 80.825,19.875 cw(c80.975,19.875) 80.868,19.981 81.465,20.577 cw(c81.57,20.471) 81.47,20.582 ; 81.47,20.583 ccw(c81.175,20.922) 81.513,20.626 cw(c81.626,20.527) 81.519,20.632 81.93,21.043 cw(c82.036,20.936) 82.036,21.086 83.518,21.086 83.568,21.036 83.677,21.036 cw(c83.565,20.936) 83.715,20.936 v1(83.715,20.861) ; v1(83.715,26.049) 83.256,26.508 82.109,26.508 82.004,26.403 82.004,25.695 84,23.699 102.089,23.699 105.011,20.777 111.767,20.777 113.291,22.301 113.291,23.79 114.594,25.093 116.227,25.093 v1(116.737,24.583)
P0.26: M1.44 P6.6 P12.6 P17.12 SB3.1 | length 92.4
  Top Layer w0.15: SB3.1@73.66,49.337 SB3.1@73.66,49.349 P6.6@73.66,54.415 P6.6@73.66,57.345 P17.12@73.66,59.69 ; M1.44@129.225,22.249 129.383,22.249 129.608,22.474 130.051,22.474 130.126,22.549 130.386,22.549 130.736,22.899 v1(131.675,22.899)
  Bottom Layer w0.15: P12.6@73.66,57.345 v1(73.66,55.88) P12.6@73.66,54.415 73.66,53.83 74.424,53.066 90.479,53.066 91.36,52.185 103.079,52.185 109.54,45.724 111.575,45.724 122.867,34.432 128.003,34.432 132.1,30.336 132.1,27.188 131.825,26.913 131.825,23.144 131.675,22.994 v1(131.675,22.899)
P0.27: M1.45 P6.7 P12.7 P17.14 SB4.1 | length 93.7
  Top Layer w0.15: SB4.1@71.12,49.337 P6.7@71.12,54.415 P6.7@71.12,57.345 P17.14@71.12,59.69 ; M1.45@129.225,22.749 129.937,22.749 130.187,22.999 v1(130.2,22.999)
  Bottom Layer w0.15: P12.7@71.12,57.345 v1(71.12,55.88) P12.7@71.12,54.415 71.12,53.83 72.159,52.791 90.365,52.791 91.246,51.91 102.965,51.91 109.426,45.449 111.461,45.449 122.753,34.157 127.889,34.157 131.825,30.222 131.825,27.301 131.55,27.026 131.55,23.749 130.8,22.999 v1(130.2,22.999)
P0.28: M1.47 P6.8 P12.8 P17.16 SB7.1 | length 95
  Top Layer w0.15: SB7.1@68.58,49.337 SB7.1@68.58,49.349 P6.8@68.58,54.415 P6.8@68.58,57.345 P17.16@68.58,59.69 ; M1.47@129.225,23.749 130.355,23.749 130.505,23.599 v1(130.6,23.599)
  Bottom Layer w0.15: P12.8@68.58,57.345 v1(68.58,55.88) P12.8@68.58,54.415 68.58,53.83 69.894,52.516 90.251,52.516 91.132,51.635 102.851,51.635 109.312,45.174 111.347,45.174 122.639,33.882 127.775,33.882 131.55,30.108 131.55,27.415 131.275,27.14 131.275,24.274 v1(130.6,23.599)
P0.29: M1.48 P24.4 P27.4 SB8.1 | length 55.4
  Top Layer w0.15: v1(97.472,50.8) SB8.1@103.122,50.8 SB8.1@103.135,50.8 ; M1.48@129.225,24.249 129.275,24.199 v1(130.2,24.199)
  Bottom Layer w0.15: v1(97.472,50.8) 103.297,50.8 109.198,44.899 111.233,44.899 122.525,33.607 127.661,33.607 131.275,29.994 131.275,27.529 131,27.254 131,24.913 130.286,24.199 v1(130.2,24.199)
P0.30: M1.49 P4.9 P10.9 P16.18 U7_S4.15 U8_S7.4 | length 162.2
  Top Layer w0.15: P4.9@21.336,53.823 22.75,52.409 22.75,41.913 26.814,37.849 U7_S4.15@28.675,37.849 ; P4.9@21.336,54.415 v1(21.336,55.88) P4.9@21.336,57.345 P16.18@21.336,59.69 ; U8_S7.4@99.825,32.949 99.93,32.949 100.118,33.136 100.118,34.581 99.775,34.924 99.775,35.949 101.125,37.299 101.125,38.963 103.3,41.138 v1(103.3,41.799) ; M1.49@129.225,24.749 129.614,24.749 129.714,24.649 130.086,24.649 130.536,25.099 v1(130.55,25.099)
  Bottom Layer w0.15: P10.9@21.336,57.345 v1(21.336,55.88) P10.9@21.336,54.415 21.336,53.83 22.292,52.874 46.618,52.874 48.718,50.774 64.703,50.774 66.262,49.215 82.806,49.215 90.226,41.795 103.3,41.795 103.304,41.799 107.604,41.799 107.804,41.599 109.789,41.599 122.294,29.093 126.222,29.093 129.495,25.821 129.828,25.821 v1(130.55,25.099)
P0.31: M1.50 P4.10 P10.10 P16.20 U7_S4.3 U8_S7.8 | length 166
  Top Layer w0.15: P4.10@18.796,53.83 22.475,50.151 22.475,41.799 27.75,36.524 29.875,36.524 30.1,36.749 U7_S4.3@30.1,37.224 ; P4.10@18.796,54.415 v1(18.796,55.88) P4.10@18.796,57.345 P16.20@18.796,59.69 ; U8_S7.8@98.4,33.574 98.4,34.963 100.85,37.413 100.85,39.077 102.825,41.052 v1(102.825,41.324) ; M1.50@129.225,25.249 129.655,25.249 129.805,25.099 v1(129.9,25.099)
  Bottom Layer w0.15: P10.10@18.796,57.345 v1(18.796,55.88) P10.10@18.796,54.415 18.796,53.83 20.027,52.599 46.504,52.599 48.604,50.499 64.589,50.499 66.148,48.94 82.692,48.94 90.133,41.499 100.686,41.499 100.861,41.324 v1(102.825,41.324) 109.675,41.324 122.181,28.818 126.108,28.818 129.828,25.099 v1(129.9,25.099)
RESET: P18.10 P25.10 Q1.2 Q1.5 R9.1 R10.1 U7_S3.16 | length 123.1
  Top Layer w0.15: U7_S3.16@17.2,26.224 17.2,26.392 17.232,26.424 18.27,26.424 18.475,26.219 18.475,23.728 28.604,13.599 59.886,13.599 70.75,24.463 70.75,27.666 72.793,29.709 v2(77.365,29.709) 80.418,29.709 81.336,30.627 87.528,30.627 88.25,31.349 93.565,31.349 96.54,28.374 P18.10@96.54,26.949 96.845,26.644 96.845,25.385 98.775,23.455 98.775,20.775 103.351,16.199 107.615,16.199 108.7,15.114 R10.1@108.715,15.114 108.745,15.144 109.46,15.144 Q1.5@109.49,15.174 ; Q1.5@109.49,15.199 109.55,15.199 109.575,15.174 110.515,15.174 ; R9.1@110.53,16.499 110.515,16.484 110.515,15.416 110.515,15.199 111.015,15.199 Q1.2@111.04,15.174
  Mid-Layer 1 w0.15: v2(77.365,27.849) v2(77.365,29.709)
RESET_BOTTOM: P7.3 SB25.1 SB27.1 U7_S10.1 U7_S10.4 | length 58.8
  Top Layer w0.15: SB25.1@55.662,31.98 55.112,31.43 55.112,24.436 55.7,23.849 55.929,23.849 ; 56.264,23.849 U7_S10.1@57.675,23.849 58,23.849 58.2,23.649 58.2,22.921 57.928,22.649 U7_S10.4@57.675,22.649
  Bottom Layer w0.15: P7.3@33.02,6.155 33.02,5.57 34.311,4.279 34.311,3.716 35.166,2.86 46.632,2.86 48.875,5.103 48.875,14.061 50.788,15.974 54.892,15.974 57.2,18.282 57.2,23.549 v1(56.85,23.899)
  Bottom Layer w0.381: P7.3@33.02,6.155 P7.3@33.02,9.085
RESET_BUTTON: R23.1 SB21.2 SB24.2 SW5.2 U3.AL27 U7_S3.15 | length 85.7
  Top Layer w0.125: U7_S3.15@16.8,26.224 16.8,25.695 16.908,25.586 16.908,25.301 R23.1@16.96,25.249 16.96,25.234 17.237,24.956 17.237,24.139 17.29,24.086 17.29,23.806 17.237,23.754 17.237,22.461 17.4,22.299 17.982,22.299 24.837,15.444 24.837,15.361 25.2,14.999 25.2,14.566 v1(25.27,14.495) ; SW5.2@18.111,5.999 24.662,5.999 25.3,6.636 v1(25.3,9.099) ; U3.AL27@27.125,25.234 27.967,24.392 27.967,23.766 27.675,23.474 27.675,21.474 v1(27.475,21.274) ; v1(55.05,20.924) 55.05,20.284 55.91,19.424 57.013,19.424 57.5,19.911 SB24.2@59,19.911
  Bottom Layer w0.125: v1@25.27,14.495 25.27,20.269 26.1,21.099 27.2,21.099 27.375,21.274 v1(27.475,21.274) ; v1(25.27,14.495) 25.27,9.128 v1(25.3,9.099) 26.8,10.599 44.3,10.599 50.6,16.899 54.5,16.899 55.05,17.449 v1(55.05,20.924)
RESET_IN_CTRL: R73.2 U3.AD2 U7_S10.10 | length 52.2
  Top Layer w0.125: v2(21.2,24.924) 21.2,24.877 21.387,24.689 21.387,23.957 21.387,23.225 21.616,22.997 21.616,21.842 27.397,16.061 30.91,16.061 32.772,14.199 46.275,14.199 v2(46.925,14.849) ; v2(46.925,16.924) 47.106,16.924 53.381,23.199 55.66,23.199 R73.2@55.775,23.084 v2(56.225,23.084)
  Top Layer w0.15: v2(58.625,23.049) U7_S10.10@59.325,23.049
  Mid-Layer 1 w0.125: v2(21.2,24.924) 21.2,25.061 21.885,25.745 22.259,25.745 22.437,25.924 22.437,26.587 22.167,26.858 v2(22.125,26.858) ; v2(46.925,14.849) v2(46.925,16.924)
  Mid-Layer 1 w0.15: v2(56.225,23.084) 56.61,22.699 58.275,22.699 v2(58.625,23.049)
RESET_OUT_CTRL: R72.1 U3.AH2 U7_S10.2 | length 51
  Top Layer w0.125: v2(21.075,24.499) 21.075,23.184 21.366,22.893 21.366,21.739 27.293,15.811 30.806,15.811 32.669,13.949 46.7,13.949 v2(47.275,14.524) ; v2(47.075,17.374) 47.202,17.374 53.277,23.449 56.681,23.449 ; R72.1@56.7,23.084 56.7,23.431 56.681,23.449 ; U7_S10.2@57.675,23.449 56.681,23.449
  Mid-Layer 1 w0.125: v2(21.075,24.499) 20.862,24.712 20.862,25.077 21.844,26.058 v2(22.125,26.058) ; v2(47.075,17.374) 47.262,17.186 47.262,14.536 v2(47.275,14.524)
RESET_P5_BOTTOM: P11.5 SB25.2 SB26.2 | length 7.4
  Top Layer w0.15: 56,30.792 56.143,30.792 v1(56.6,31.249) 56.6,31.718 SB25.2@56.338,31.98
  Bottom Layer w0.15: v1(56.6,31.249) 57.369,30.48 P11.5@62.072,30.48
RESET_P5_TOP: P5.5 SB26.1 SB28.2 | length 8.1
  Top Layer w0.15: 55.853,30.168 56.353,30.168 ; SB28.2@56.338,28.98 56.338,30.152 56.353,30.168 ; v2(59.794,30.48) 56.869,30.48 56.557,30.168 56.353,30.168 ; v2(61.006,30.48) P5.5@62.357,30.48 P5.5@62.674,30.48
  Mid-Layer 1 w0.15: v2(59.794,30.48) v2(61.006,30.48)
RESET_TOP: P1.3 P13.6 SB27.2 SB28.1 U7_S10.16 | length 56.3
  Top Layer w0.15: SB28.1@55.662,28.98 55.4,28.718 55.4,24.669 55.595,24.474 56,24.474 U7_S10.16@57.9,24.474
  Top Layer w0.75: P13.6@33.02,3.81 P1.3@33.02,6.155 P1.3@33.02,9.085
  Bottom Layer w0.15: P13.6@33.02,3.81 34.436,2.394 46.934,2.394 49.15,4.61 49.15,13.947 50.889,15.686 55.187,15.686 57.725,18.224 57.725,23.66 56.861,24.524 v1(56.825,24.524)
SCL_EXT: R49.1 U5.12 U8_S7.7 | length 5.4
  Top Layer w0.15: U8_S7.7@98.8,33.574 98.8,33.099 v2(99.15,32.749) ; v2(100.625,32.549) 100.625,32.122 100.998,31.749 U5.12@102.585,31.749 ; R49.1@101.118,31.384 101.118,31.746
  Mid-Layer 1 w0.15: v2(99.15,32.749) 100.425,32.749 v2(100.625,32.549)
SDA_EXT: R48.1 U5.13 U8_S7.3 | length 4.5
  Top Layer w0.15: U8_S7.3@99.825,32.549 100.078,32.549 100.35,32.277 100.35,31.556 100.917,30.989 101.124,30.989 ; R48.1@101.118,30.571 101.118,30.983 101.124,30.989 ; U5.13@102.81,31.017 102.781,30.989 101.124,30.989
SHIELD_DETECT: R69.1 SB18.2 U3.AE31 | length 42.2
  Top Layer w0.125: U3.AE31@28.125,26.658 28.631,26.658 28.94,26.349 32.875,26.349 v2(33.804,25.42) ; v1(65.385,29.464) R69.1@65.385,28.549 65.862,28.549 SB18.2@66.662,27.749
  Mid-Layer 1 w0.125: v2(33.804,25.42) 37.621,25.42 41.35,29.149 v1(53.1,29.149)
  Bottom Layer w0.125: v1(53.1,29.149) 53.733,29.782 65.066,29.782 v1(65.385,29.464)
SIM_1V8: M1.19 P30.2 SB12.1 | length 20.5
  Top Layer w0.25: P30.2@107.27,11.799 112.058,11.799 112.958,12.699 115.397,12.699 116.8,14.102 v3(116.8,17.299) ; v3(117.7,18.399) 117.4,18.699 117.4,21.103 117.546,21.249 M1.19@117.975,21.249
  Top Layer w0.254: 106.24,13.944 106.762,13.421 P30.2@106.762,12.307
  Mid-Layer 1 w0.25: v3(116.8,17.299) 117.69,18.189 117.69,18.389 v3(117.7,18.399)
SIM_CLK: M1.18 P28.5 U8_S9.4 | length 49
  Top Layer w0.203: U8_S9.4@87.275,17.449 87.252,17.426 86.994,17.426 86.773,17.205 86.773,16.851 87.498,16.126 92.998,16.126 94.197,14.927 94.197,13.969 94.941,13.226 97.398,13.226 P28.5@98,12.624 ; P28.5@98,11.799 P28.5@98,12.624 ; M1.18@117.975,21.749 117.45,21.749 117,21.299 117,18.327 117.8,17.527 117.8,14.14 115.679,12.019 113.24,12.019 110.238,9.018 103.953,9.018 102.394,10.577 102.394,12.355 101.523,13.226 98.552,13.226 98,12.674 P28.5@98,12.624
SIM_IO: M1.17 P28.4 U8_S9.8 | length 47
  Top Layer w0.203: U8_S9.8@88.7,16.824 92.764,16.824 94.525,15.063 94.525,14.174 v2(94.775,13.924) 95.145,13.554 97.738,13.554 97.844,13.447 98.156,13.447 98.262,13.554 101.659,13.554 102.722,12.491 102.722,10.713 104.089,9.346 110.102,9.346 113.104,12.347 115.543,12.347 117.3,14.105 117.3,17.499 116.672,18.127 116.672,21.671 117.25,22.249 M1.17@117.975,22.249
  Mid-Layer 1 w0.203: v2(94.775,13.924) 95.65,14.799 v2(96.73,14.799)
SIM_RST: M1.16 P28.6 U8_S9.12 | length 43.8
  Top Layer w0.203: U8_S9.12@88.925,18.649 91.403,18.649 94.853,15.199 94.853,14.405 95.377,13.882 97.874,13.882 97.883,13.872 97.925,13.872 97.974,13.824 v2(98,13.824) ; P28.6@98,15.699 98,16.481 98.278,16.759 98.544,16.759 98.663,16.878 98.663,16.993 98.796,17.126 101.18,17.126 103.168,15.137 107.285,15.137 109.125,13.297 115.498,13.297 116.3,14.099 116.3,22.099 116.974,22.773 117.952,22.773 M1.16@117.975,22.749
  Mid-Layer 1 w0.203: v2(98,13.824) v2(98,14.799)
SIM_SELECT: R63.1 U3.AK8 U8_S9.2 | length 96.1
  Top Layer w0.125: v2(17.575,22.799) 17.836,22.799 18.086,22.549 25.087,15.548 25.087,15.465 28.041,12.511 60.337,12.511 69.426,21.6 89.628,21.6 91.552,19.676 91.552,19.646 91.967,19.232 91.967,19.157 v2(92,19.124) ; U8_S9.2@87.275,18.249 87.8,18.249 v2(87.85,18.199)
  Mid-Layer 1 w0.125: v2(17.575,22.799) 18.063,23.287 20.557,23.287 21.537,24.268 21.537,25.045 21.892,25.399 23.066,25.399 v2(23.325,25.658) ; v2(87.85,18.199) 91.075,18.199 v2(92,19.124)
SW1: L7.2 U9.3 | length 3.9
  Top Layer w0.2: U9.3@14.975,13.424 15.538,13.424 16.341,12.621 17.762,12.621 18.227,12.156 L7.2@18.227,11.996
SW2: L8.2 U9.5 | length 4
  Top Layer w0.2: U9.5@14.975,14.424 15.538,14.424 16.28,15.166 18.402,15.166 L8.2@18.625,15.389
SWD0.RESET: P19.10 R30.2 | length 37.6
  Top Layer w0.125: R30.2@25.45,35.693 v1(25.45,36.549)
  Top Layer w0.15: P19.10@1.936,61.57 v1(3.505,61.57)
  Bottom Layer w0.15: v1(3.505,61.57) 16.235,48.839 16.235,44 22.961,37.274 24.725,37.274 v1(25.45,36.549)
SWD0.SWDCLK: P19.4 R29.2 | length 34.8
  Top Layer w0.125: R29.2@24.25,35.693 v1(24.25,36.549)
  Top Layer w0.15: P19.4@1.936,57.76 v1(3.505,57.76)
  Bottom Layer w0.15: v1(3.505,57.76) 6.537,57.76 15.685,48.612 15.685,43.772 22.733,36.724 24.075,36.724 v1(24.25,36.549)
SWD0.SWDIO: P19.2 R28.2 | length 33.5
  Top Layer w0.125: R28.2@23.65,35.693 v1(23.65,36.218)
  Top Layer w0.15: P19.2@1.936,56.49 v1(3.505,56.49)
  Bottom Layer w0.15: v1(3.505,56.49) 7.418,56.49 15.41,48.498 15.41,43.658 22.619,36.449 23.419,36.449 v1(23.65,36.218)
SWD0_CLK: R29.1 U3.B18 | length 4.3
  Top Layer w0.125: v2(24.25,34.808) R29.1@24.25,35.123
  Mid-Layer 1 w0.125: v2(24.25,34.808) 24.762,34.296 24.762,31.896 25.062,31.595 25.065,31.595 25.262,31.398 25.262,31.395 25.325,31.333 v2(25.325,31.258)
SWD0_IO: R28.1 U3.B16 | length 4.4
  Top Layer w0.125: v2(23.65,34.808) R28.1@23.65,35.123
  Mid-Layer 1 w0.125: v2(23.65,34.808) 24.512,33.946 24.512,31.748 24.862,31.398 24.862,31.32 v2(24.925,31.258)
SWD0_RESET: R30.1 U3.B22 | length 4.3
  Top Layer w0.125: v2(25.45,34.808) R30.1@25.45,35.123
  Mid-Layer 1 w0.125: v2(25.45,34.808) 25.262,34.62 25.262,32.198 26.062,31.398 26.062,31.345 26.125,31.283 v2(26.125,31.258)
SWD0_SEL: P19.3 U3.B24 | length 38
  Top Layer w0.15: P19.3@5.836,57.76 v1(8.139,57.76)
  Mid-Layer 1 w0.125: v1(26.05,36.233) 26.05,34.808 25.512,34.27 25.512,32.348 26.462,31.398 26.462,31.32 v2(26.525,31.258)
  Bottom Layer w0.15: v1(8.139,57.76) 8.139,57.324 16.51,48.953 16.51,44.114 23.075,37.549 25.086,37.549 26.05,36.585 v1(26.05,36.233)
SWD0_SWO: P19.6 U3.B20 | length 40.8
  Top Layer w0.15: P19.6@1.936,59.03 v1(3.505,59.03)
  Mid-Layer 1 w0.125: v1(24.85,36.233) 24.85,34.562 25.012,34.399 25.012,32.048 25.662,31.398 25.662,31.345 25.725,31.283 v2(25.725,31.258)
  Bottom Layer w0.15: v1(3.505,59.03) 5.656,59.03 15.96,48.725 15.96,43.886 22.847,36.999 24.5,36.999 24.85,36.649 v1(24.85,36.233)
SWD1.RESET: P20.7 P26.7 R27.2 | length 28.8
  Top Layer w0.15: R27.2@30.66,23.358 v1(31.609,23.358) ; P20.7@34.036,44.255 v1(34.036,45.72) P20.7@34.036,47.185
  Bottom Layer w0.15: v1(31.609,23.358) 31.759,23.358 32.2,23.799 32.2,23.824 32.337,23.961 32.337,41.971 34.036,43.67 P26.7@34.036,44.255 v1(34.036,45.72) P26.7@34.036,47.185
SWD1.SWDCLK: P20.5 P26.5 R26.2 | length 29.3
  Top Layer w0.15: P20.5@28.956,43.688 P20.5@28.956,44.255 P20.5@28.956,47.185 ; R26.2@30.66,24.258 v1(31.609,24.258)
  Bottom Layer w0.15: P26.5@28.956,47.185 v1(28.956,45.72) 28.956,43.67 29.666,42.96 30.864,42.96 31.787,42.036 31.787,24.436 v1(31.609,24.258)
SWD1.SWDIO: P20.4 P26.4 R25.2 | length 29.9
  Top Layer w0.15: P20.4@26.416,44.348 P20.4@26.416,47.185 ; R25.2@30.66,24.858 v1(31.159,24.858)
  Bottom Layer w0.15: P26.4@26.416,47.185 v1(26.416,45.72) P26.4@26.416,44.255 26.416,43.67 27.401,42.685 30.75,42.685 31.512,41.923 31.512,25.211 v1(31.159,24.858)
SWD1_CLK: R26.1 U3.AK28 | length 3.4
  Top Layer w0.15: v2(29.176,24.709) 29.627,24.258 R26.1@30.09,24.258
  Mid-Layer 1 w0.125: v2(27.325,25.658) 27.325,25.611 27.387,25.548 27.387,25.518 28.16,24.746 29.015,24.746 29.019,24.743 29.143,24.743 v2(29.176,24.709)
SWD1_IO: R25.1 U3.AK30 | length 2.7
  Top Layer w0.15: v2(29.477,25.01) 29.628,24.858 R25.1@30.09,24.858
  Mid-Layer 1 w0.125: v2(27.725,25.658) 28.336,25.047 29.316,25.047 29.319,25.043 29.443,25.043 v2(29.477,25.01)
SWD1_RESET: R27.1 U3.AK24 | length 4.6
  Top Layer w0.15: v2(28.575,24.108) 29.325,23.358 R27.1@30.09,23.358
  Mid-Layer 1 w0.125: v2(26.525,25.658) 26.558,25.625 26.558,25.496 27.937,24.117 28.566,24.117 v2(28.575,24.108)